# Allegro board PCBP1FINALultimul.brd
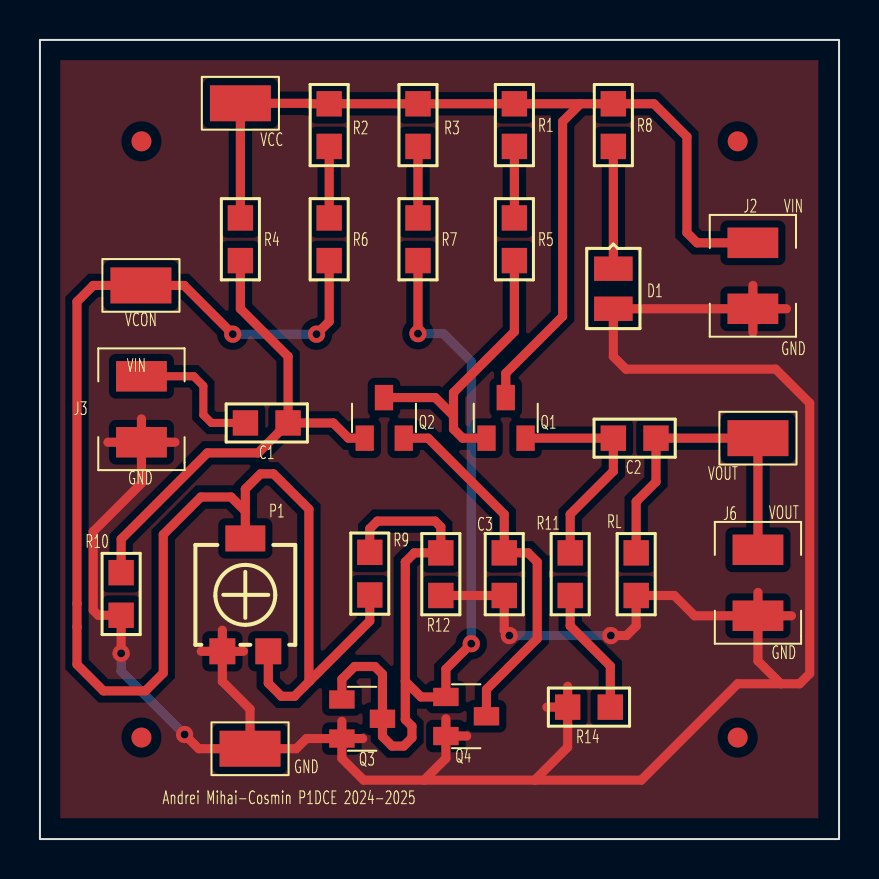
[diagram p0: board, top side]
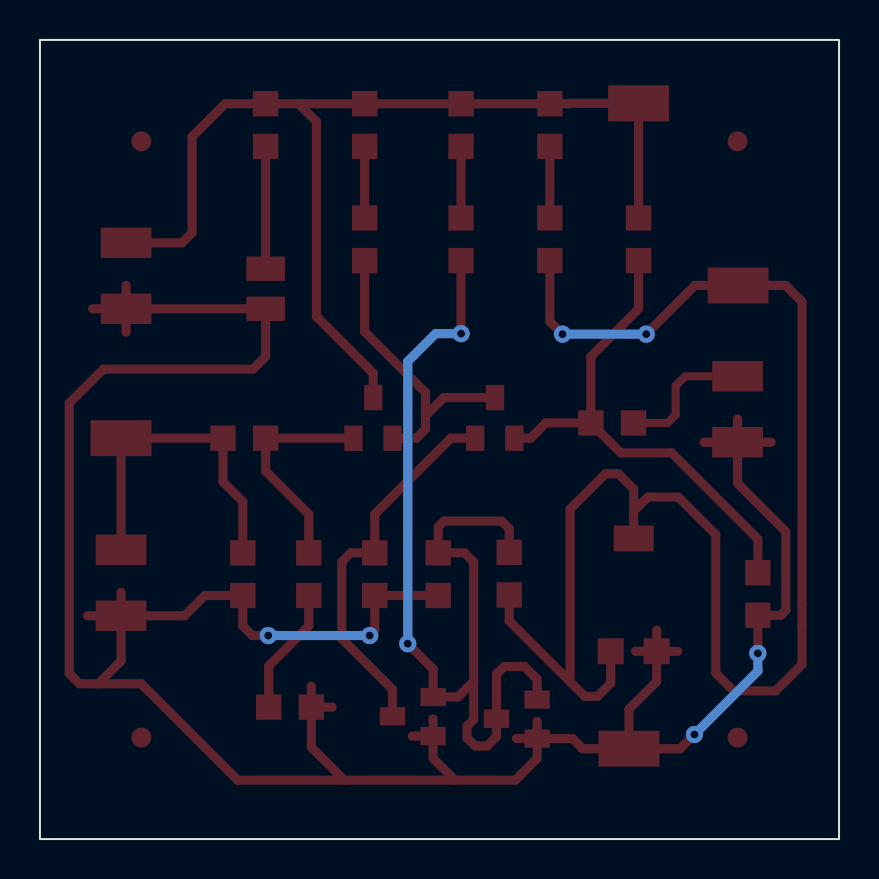
[diagram p1: board, bottom side, seen from below]

Outline 40 x 40 mm; copper layers: TOP, BOTTOM. Coordinates in mm from the lower left corner of the outline.
Outline path: rectangle 0,0 40,40

## Design rules (mm)
nets with their own width: min track width 0.406; nets VIN
nets with their own width: min track width 0.457; nets GND N30956 N31026 N31068 N31092 N31138 N31152 N31198 N31202 N31348 N309981 N314541 VCC VOUT

## Placement (name value [footprint] x y rotation side)
C1  4.7u  [SMC0805]  10.29 20.83 0 top
C2  4.7u  [SMC0805]  28.7 20.07 0 top
C3  330n  [SMC0805]  23.24 12.19 90 top
D1  5V,LED,LED  [SMD080512]  28.7 28.55 270 top
GND  -  [unnamed#2]  10.52 4.52 0 top
J2  CON2  [1210RF_WV_12D]  35.69 28.19 270 top
J3  CON2  [1210RF_WV_12D]  5.08 21.51 270 top
J6  CON2  [1210RF_WV_12D]  35.94 12.83 270 top
NOREF  -  [unnamed]  34.92 34.92 0 top
NOREF#2  -  [#3]  0 0 90 top
NOREF#3  -  [unnamed]  5.08 5.08 0 top
NOREF#4  -  [unnamed]  34.92 5.08 0 top
NOREF#5  -  [unnamed]  5.08 34.92 0 top
NOREF#6  -  [#3]  0 40 0 top
P1  5k  [TS53YL]  11.43 9.4 270 top
Q1  BC846B  [TO236]  22.35 20.19 270 top
Q2  BC846B  [TO236]  16.26 20.19 270 top
Q3  BC846B  [TO236]  15.24 6.99 180 top
Q4  BC846B  [TO236]  20.45 7.11 180 top
R1  4.7k  [SMR0805]  23.75 34.67 90 top
R2  1k  [SMR0805]  14.48 34.67 90 top
R3  68k  [SMR0805]  18.92 34.67 90 top
R4  10k  [SMR0805]  10.03 28.96 90 top
R5  470  [SMR0805]  23.75 28.96 90 top
R6  6.8k  [SMR0805]  14.48 28.96 90 top
R7  3.3k  [SMR0805]  18.92 28.96 90 top
R8  1k  [SMR0805]  28.7 34.67 90 top
R9  3.3k  [SMR0805]  16.51 14.35 270 top
R10  10k  [SMR0805]  4.06 11.2 90 top
R11  510  [SMR0805]  26.54 12.19 90 top
R12  100k  [SMR0805]  20.07 12.19 90 top
R14  510  [SMR0805]  26.42 6.6 0 top
RL  820  [SMR0805]  29.84 12.19 90 top
VCC  -  [unnamed#2]  10.03 36.83 0 top
VCON  -  [unnamed#2]  5.05 27.71 0 top
VOUT  -  [unnamed#2]  35.94 20.07 0 top

## Library data of the parts
C1-C3 = C
D1 = LED
J2 J3 J6 = CON2
P1 = POT
Q1-Q4 = BC846B
R1-R12 R14 RL = R

## Footprints (pads in the part's own frame, mm; a bottom-side part is the same pattern mirrored in y, then rotated)
1210RF_WV_12D
  rect 1.524x2.54 smd: 1(-1.651,0) 2(1.651,0)
SMC0805
  rect 1.27x1.27 smd: 1(0,0) 2(2.134,0)
SMD080512
  rect 1.219x1.93 smd: 1(0,0) 2(2.007,0)
SMR0805
  rect 1.27x1.27 smd: 1(0,0) 2(2.134,0)
TO236
  rect 1.27x0.914 smd: 1(0.127,0) 2(0.127,1.956) 3(-1.905,0.965)
TS53YL
  rect 1.3x1.3 smd: 1(0,0) 3(0,-2.3)
  rect 1.3x2 smd: 2(-5.65,-1.15)
unnamed
  round 1 smd: (0,0)
unnamed#2
  rect 3.05x1.8 smd: 1(0,0)

## Nets
GND: C3.1 D1.2 GND.1 J2.2 J3.2 J6.2 P1.3 Q3.2(E) Q4.2(E) R10.1 R12.1 R14.1 RL.1
VCC: J2.1 Q1.3 R1.2 R2.2 R3.2 R4.2 R8.2 VCC.1
VIN: C1.1 J3.1
VOUT: C2.2 J6.1 RL.2 VOUT.1
N30956: R1.1 R5.2
N31026: R3.1 R7.2
N31068: C1.2 Q2.1 R4.1 R10.2
N31092: Q1.1 Q2.3 R5.1
N31138: P1.1 P1.2(T) R6.1 R9.2 VCON.1
N31152: Q3.1 Q3.3 Q4.1 R7.1 R9.1 R12.2
N31198: C2.1 Q1.2(E) R11.2
N31202: D1.1 R8.1
N31348: C3.2 Q2.2(E) Q4.3
N309981: R2.1 R6.2
N314541: R11.1 R14.2

## Via types
v1: diameter 0.864, hole 0.4, TOP to BOTTOM, 8 vias

## Routing (per net, layer and track width the routed paths; a pad name or vN(x,y) marks a point on that pad's centre or on a via; arc(x,y) is an arc through that point)
GND: length 144
  TOP w0.457: R14.1 26.42,4.6 24.77,2.95 ; R14.1 25.37,6.6 ; R14.1 26.42,7.65 ; v1(4.06,9.3) R10.1 2.92,11.2 2.67,11.46 2.67,15.39 5.08,17.81 J3.2 ; GND.1 12.83,4.52 13.34,5.03 Q3.2 ; GND.1 7.95,4.52 v1(7.24,5.23) ; GND.1 10.52,6.5 9.13,7.89 P1.3 ; Q3.2 15.11,5.89 ; Q3.2 16.15,5.03 ; Q3.2 15.11,4.04 16.21,2.95 19.23,2.95 ; 24.77,2.95 19.23,2.95 ; 24.77,2.95 30.1,2.95 34.92,7.77 37.08,7.77 ; J6.2 35.94,12.34 ; J6.2 32.77,11.18 31.75,12.19 RL.1 29.84,10.67 29.36,10.19 v1(28.57,10.19) ; J6.2 35.94,8.92 37.08,7.77 ; J6.2 37.62,11.18 ; Q4.2 20.32,6.02 ; Q4.2 20.32,4.04 19.23,2.95 ; Q4.2 21.36,5.16 ; P1.3 8.07,9.4 ; P1.3 10.19,9.4 ; P1.3 9.13,10.45 ; 37.08,7.77 38.02,7.77 38.53,8.28 38.53,21.82 36.83,23.52 29.34,23.52 28.7,24.16 D1.2 J2.2 ; J3.2 6.76,19.86 ; J3.2 3.4,19.86 ; J3.2 5.08,21.03 ; R12.1 C3.1 23.24,10.44 v1(23.5,10.19) ; J2.2 35.69,27.71 ; J2.2 37.36,26.54 ; J2.2 35.69,25.37
  BOTTOM w0.457: v1(4.06,9.3) 4.06,8.41 v1(7.24,5.23) ; v1(23.5,10.19) v1(28.57,10.19)
VCC: length 53.4
  TOP w0.457: Q1.3 23.32,23.32 26.16,26.16 26.16,35.92 27.05,36.8 ; 27.05,36.8 R8.2 30.73,36.8 32.38,35.15 32.38,30.35 32.89,29.85 J2.1 ; 27.05,36.8 R1.2 R3.2 R2.2 13.49,36.8 13.46,36.83 VCC.1 R4.2
VIN: length 7
  TOP w0.406: J3.1 7.7,23.16 8.18,22.68 8.18,21.23 8.59,20.83 C1.1
VOUT: length 16.8
  TOP w0.457: RL.2 29.84,16.89 30.84,17.88 C2.2 VOUT.1 J6.1
N30956: length 3.6
  TOP w0.457: R1.1 R5.2
N31026: length 3.6
  TOP w0.457: R3.1 R7.2
N31068: length 25.7
  TOP w0.457: C1.2 12.42,24.16 10.03,26.54 R4.1 ; C1.2 14.68,20.83 15.44,20.07 Q2.1 ; C1.2 10.92,19.33 8.38,19.33 4.06,15.01 R10.2
N31092: length 15.4
  TOP w0.457: Q2.3 19.79,22.1 20.7,21.18 ; Q1.1 21.16,20.07 20.7,20.52 20.7,21.18 ; 20.7,21.18 20.7,22.35 23.75,25.4 R5.1
N31138: length 77.9
  TOP w0.457: 13.46,7.87 13.46,16.51 11.69,18.28 11.04,18.28 10.28,17.52 10.28,16.41 ; 13.46,7.87 16.51,10.92 R9.2 ; 13.46,7.87 12.73,7.15 12.09,7.15 11.43,7.8 P1.1 ; 10.28,16.41 9.57,17.12 8.05,17.12 6.17,15.24 6.17,8.31 5.28,7.42 3.17,7.42 1.85,8.74 1.85,10.62 1.85,10.62 1.85,11.78 1.85,11.78 1.85,26.9 2.67,27.71 VCON.1 7.21,27.71 v1(9.65,25.27) ; 10.28,16.41 P1.2 ; v1(13.84,25.27) 14.48,25.91 R6.1
  BOTTOM w0.457: v1(13.84,25.27) v1(9.65,25.27)
N31152: length 52.2
  TOP w0.457: 18.29,7.9 18.29,5.98 18.62,5.65 18.62,5.07 18.21,4.65 17.62,4.65 17.14,5.13 Q3.3 17.14,8.25 16.76,8.64 15.75,8.64 15.11,8 Q3.1 ; 18.29,7.9 18.29,13.87 18.75,14.33 R12.2 20.07,15.62 19.77,15.91 16.89,15.91 16.51,15.53 R9.1 ; 18.29,7.9 19.08,7.11 Q4.1 20.32,8.51 v1(21.59,9.78) ; R7.1 v1(18.92,25.3)
  BOTTOM w0.457: v1(21.59,9.78) 21.59,23.9 20.19,25.3 v1(18.92,25.3)
N31198: length 11
  TOP w0.457: R11.2 26.54,16.26 28.7,18.42 C2.1 Q1.2
N31202: length 6.1
  TOP w0.457: R8.1 D1.1
N31348: length 19.2
  TOP w0.457: Q2.2 19.43,20.07 23.24,16.26 C3.2 24.43,14.33 24.89,13.87 24.89,10.03 22.35,7.49 Q4.3
N309981: length 3.6
  TOP w0.457: R2.1 R6.2
N314541: length 6.4
  TOP w0.457: R14.2 28.55,8.66 26.54,10.67 R11.1

## Copper pours and planes (outline as drawn; the poured copper is in the pictures)
GND on TOP: 1.02,38.99 1.02,1.04 38.96,1.04 38.96,38.99

## Text on the board
Ref Des/Assembly Top: R2
Ref Des/Silkscreen Top: Andrei Mihai-Cosmin P1DCE 2024-2025 | R2 | VIN | GND | VOUT
XSECTION_CHART: *  SURFACE | L1 TOP CONDUCTOR | *  DIELECTRIC | L2 BOTTOM CONDUCTOR | DESIGN CROSS SECTION CHART | ___________________________ | TOTAL THICKNESS 62.992 MIL | 1-2
DIMENSION: FIGURE | FINISHED_SIZE | 15.75 | DRILL CHART: TOP to BOTTOM | ALL UNITS ARE IN MILS | PLATED | QTY | 8
